# EAGLE board 2021-05-12_11-54-31 (EAGLE 6.4)
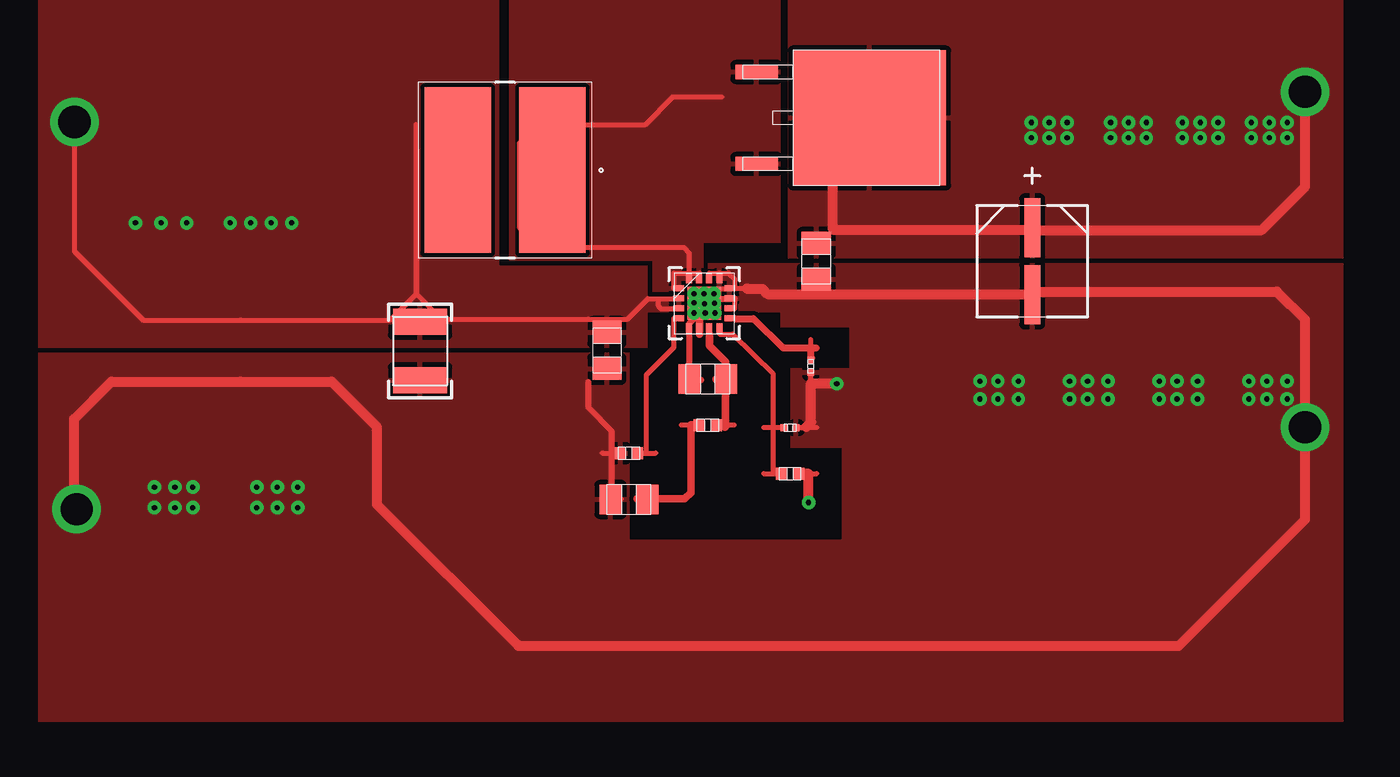
[diagram p0: board, top side]
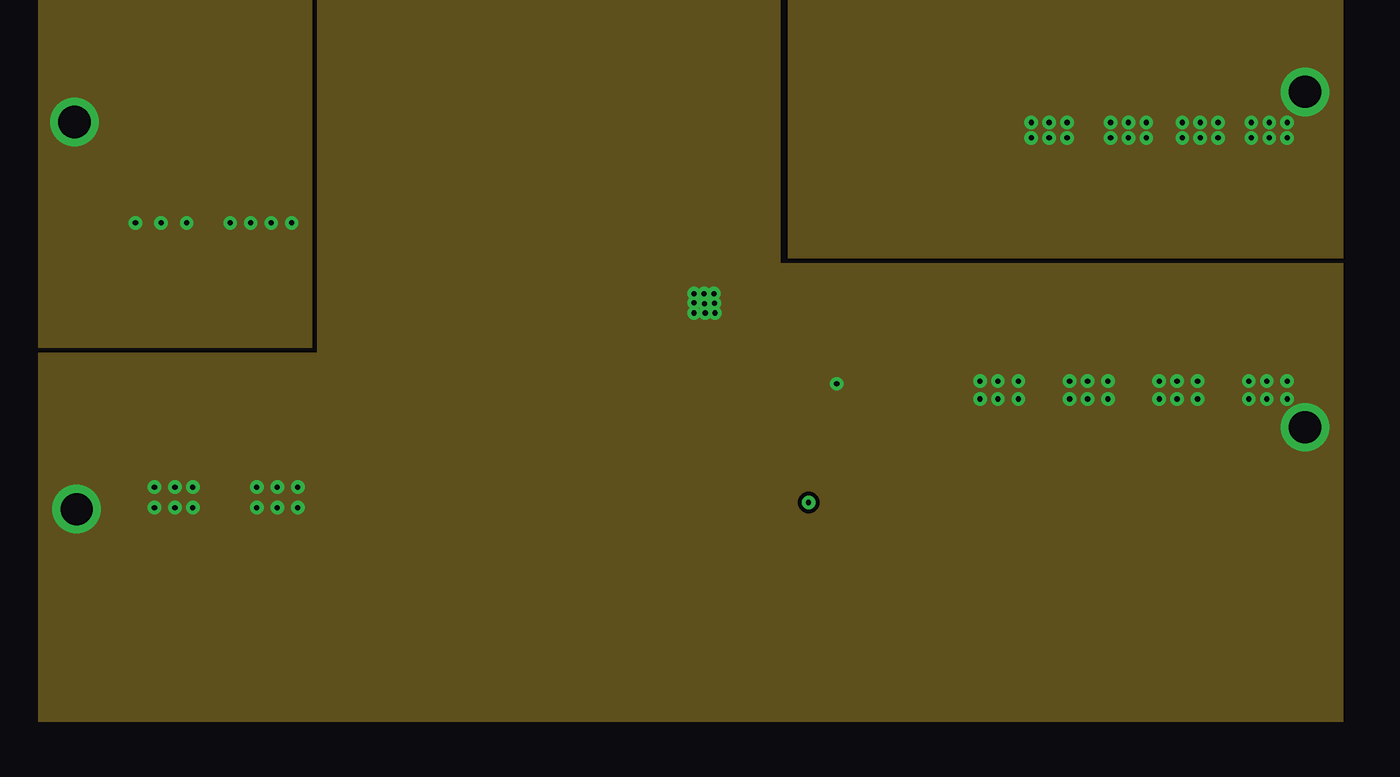
[diagram p1: board, inner layer INTERNAL1]
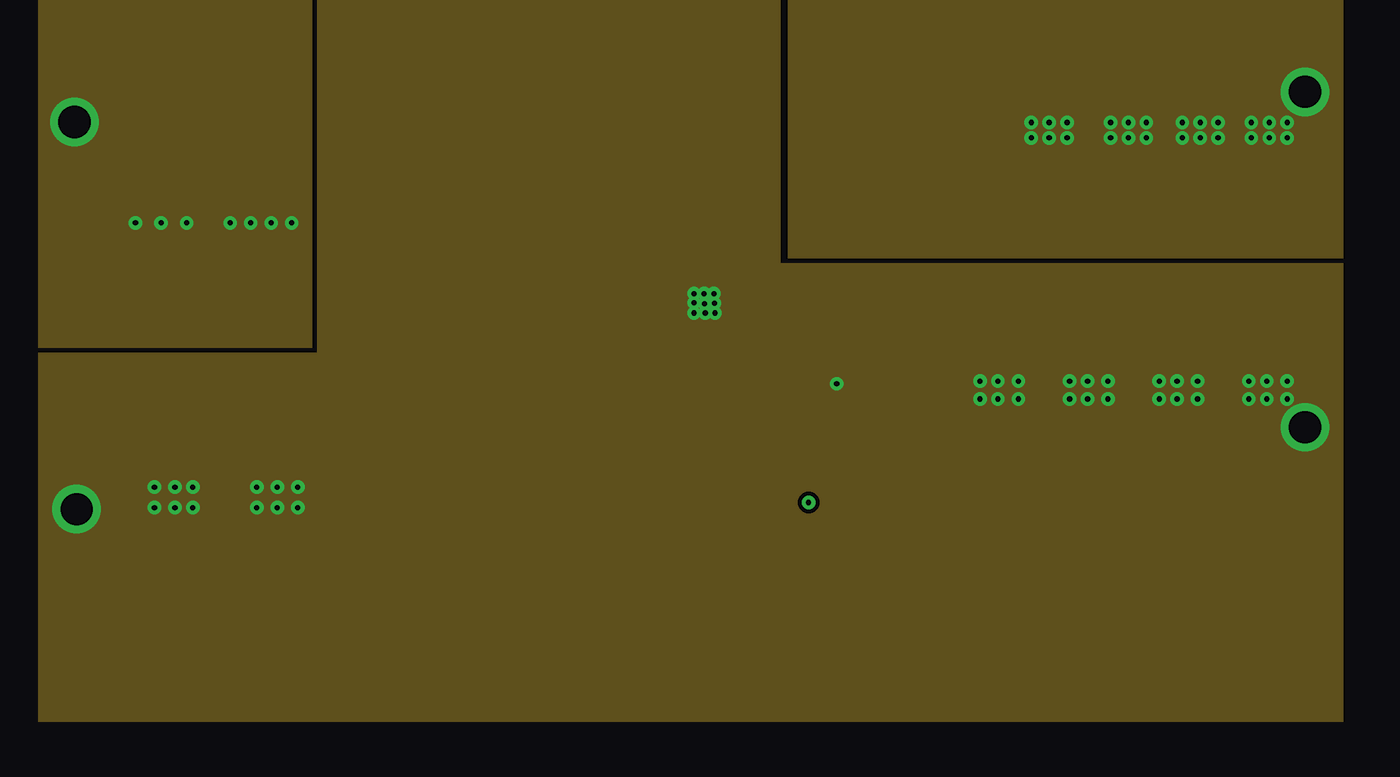
[diagram p2: board, inner layer INTERNAL2]
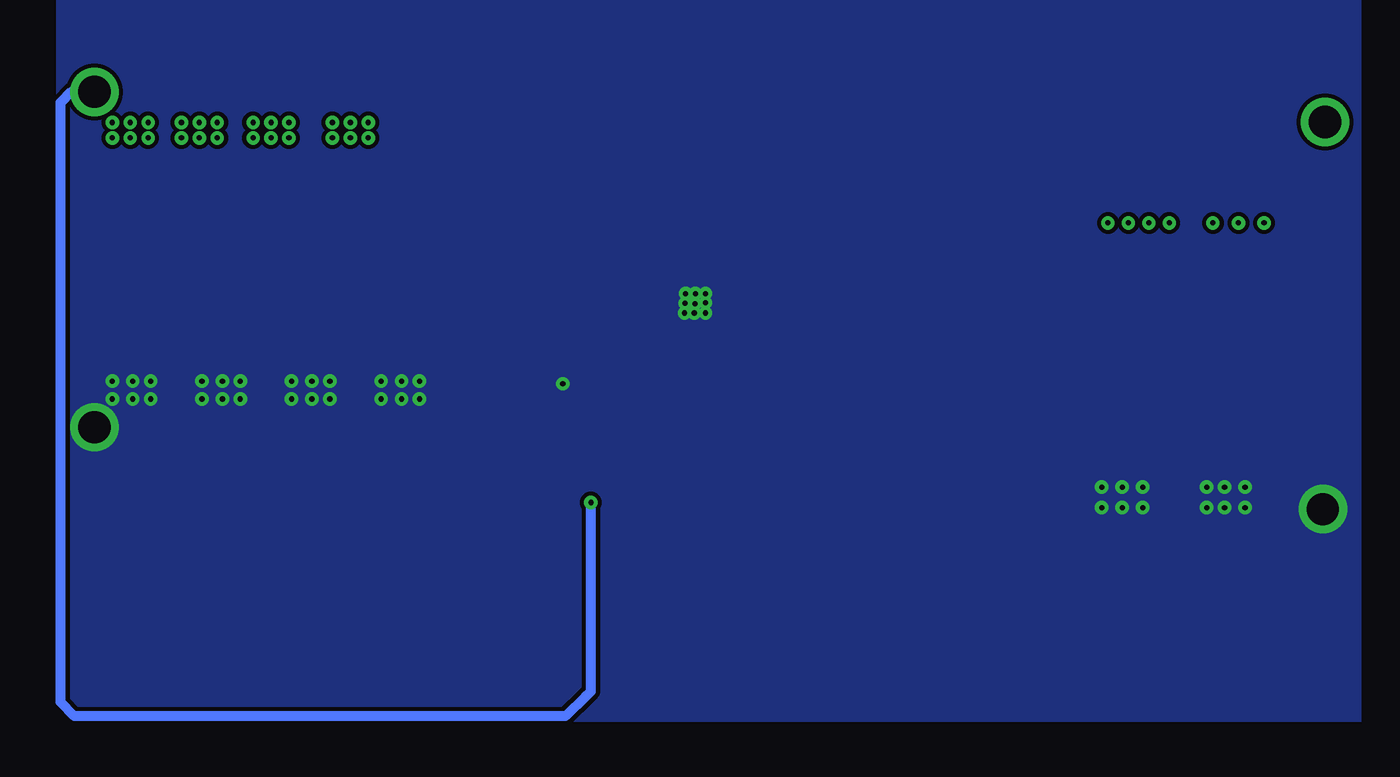
[diagram p3: board, bottom side, seen from below]

No outline drawn. Coordinates in mm, seen from the top.
Copper layers ((1*2)+(15*16)): TOP / INTERNAL1 / layer 15 / BOTTOM

## Footprints (pad centres in the part's own frame; a part is rotated, then mirrored left to right if it is on the bottom)
0805 = smd 1.118 x 1.448: 1 -0.902,0; 2 0.902,0
1210 = smd 1.3 x 2.7: 1 -1.45,0; 2 1.45,0
CAPSMT_62_E61 = smd 2.934 x 0.787: 1 -1.657,0; 2 1.657,0
0402 = smd 0.559 x 0.61: 1 -0.419,0; 2 0.419,0
DPAK = smd 0.701 x 2.111: 1 -2.28,-5.45; 3 2.28,-5.45 | smd 6.7 x 7.605: 2 0,0.152
TP-5012 = drill 0.813 round: 1 0,0
VLP8040 = smd 3.302 x 8.204: 1 -2.349,0; 2 2.349,0
0201 = smd 0.356 x 0.33: 1 -0.292,0; 2 0.292,0
S-PWQFN-N16 = smd 0.5 x 0.3: 1 -1.25,0.75; 2 -1.25,0.25; 3 -1.25,-0.25; 4 -1.25,-0.75; 9 1.25,-0.75; 10 1.25,-0.25; 11 1.25,0.25; 12 1.25,0.75 | smd 0.3 x 0.5: 5 -0.75,-1.25; 6 -0.25,-1.25; 7 0.25,-1.25; 8 0.75,-1.25; 13 0.75,1.25; 14 0.25,1.25; 15 -0.25,1.25; 16 -0.75,1.25 | smd 1.65 x 1.65: 17 0,0

## Placement (x,y rotation side)
Ccomp  [0805]  55.35,37.06 180 top
Ccomp2  [0805]  59.26,43.03 0 top
Cin  [1210]  44.98,44.42 270 top
Cinx  [0805]  54.25,44.45 270 top
Cout  [CAPSMT_62_E61]  75.36,48.87 270 top
Coutx  [0805]  64.64,48.87 270 top
Css  [0402]  55.35,39.34 180 top
D1  [DPAK]  67.13,55.98 270 top
GND  [TP-5012]  27.91,36.55 0 top
GND1  [TP-5012]  88.9,40.61 0 top
L1  [VLP8040]  49.2,53.39 180 top
Rcomp  [0402]  59.26,40.74 0 top
Rfbb  [0201]  63.35,40.61 0 top
Rfbt  [0402]  63.35,38.33 180 top
Rt  [0201]  64.36,43.66 270 top
U1  [S-PWQFN-N16]  59.08,46.79 0 top
Vin  [TP-5012]  27.81,55.78 0 top
Vout  [TP-5012]  88.9,57.25 0 top

## Library data of the parts
Ccomp = ultra-librarian; RefDes: Ccomp; Type: CGA4C2C0G1H103J060AA
Ccomp2 = ultra-librarian; RefDes: Ccomp2; Type: C2012C0G1H152J060AA
Cin = ultra-librarian; RefDes: Cin; Type: C3225X7R1H106M250AC
Cinx = ultra-librarian; RefDes: Cinx; Type: C0805C104M5RACTU
Cout = ultra-librarian; RefDes: Cout; Type: 25SVPF27MX
Coutx = ultra-librarian; RefDes: Coutx; Type: GMK212B7105KG-T
Css = ultra-librarian; RefDes: Css; Type: GRM155R71C223KA01D
D1 = ultra-librarian; RefDes: D1; Type: SBRD10200TR
GND = ultra-librarian; RefDes: GND; Type: TP-5012
GND1 = ultra-librarian; RefDes: GND1; Type: TP-5012
L1 = ultra-librarian; RefDes: L1; Type: VLP8040T-2R2N
Rcomp = ultra-librarian; RefDes: Rcomp; Type: CRCW04022K43FKED
Rfbb = ultra-librarian; RefDes: Rfbb; Type: RC0201FR-0710KL
Rfbt = ultra-librarian; RefDes: Rfbt; Type: CRCW0402143KFKED
Rt = ultra-librarian; RefDes: Rt; Type: CRCW020144K2FNED
U1 = ultra-librarian; RefDes: U1; Type: TPS55340QRTERQ1
Vin = ultra-librarian; RefDes: Vin; Type: TP-5012
Vout = ultra-librarian; RefDes: Vout; Type: TP-5012

## Nets
0: Ccomp2.1 Ccomp.2 Cin.2 Cinx.2 Cout.2 Coutx.2 Css.2 GND1.1 GND.1 Rfbb.2 Rt.2 U1.5 U1.6 U1.11 U1.12 U1.13 U1.17
1: Cin.1 Cinx.1 L1.1 U1.2 U1.3 Vin.1
2: Css.1 U1.4
3: Rfbb.1 Rfbt.2 U1.8
4: Ccomp2.2 Rcomp.2 U1.7
5: D1.1 D1.3 L1.2 U1.1 U1.15 U1.16
6: Rt.1 U1.9
8: Ccomp.1 Rcomp.1
9: Cout.1 Coutx.1 D1.2 Rfbt.1 Vout.1
S$10netdata: U1.10 U1.14

## Tracks (layer width: path | path; a pad name or v marks a point on that pad's centre or on a via)
0  (via drill 0.25 pad 0.56, 1.6 pad 2.21)
  TOP 0.254: 60.6,47.52 60.6,47.98 60.3,48.28 59.84,48.28 59.33,48.28 | 60.6,47.52 61.19,47.52 | 60.6,47.52 60.58,47.5 59.66,47.5 59.59,47.42 59.59,47.24 | 60.6,46.53 60.6,47.02 | 75.56,47.37 75.69,47.5 | 54.03,39.36 54.97,39.36 | 54.03,37.07 54.97,37.07 | 57.94,43.04 58.88,43.04 | 63.73,40.63 64.67,40.63 | 64.38,42.34 64.38,43.28
  TOP 0.305: 53.34,42.88 53.34,41.63 54.51,40.44 54.51,39.37 54.51,37.08 | 58.93,42.98 58.5,42.98 58.42,43.05 | 60.6,47.02 59.82,47.02 v59.59,46.79 58.85,46.05 | 58.34,43.2 58.34,45.26 58.34,45.8 58.67,46.13 58.67,46.38 | 58.34,42.98 58.34,43.05
  TOP 0.381: 58.85,45.26 58.85,46.05
  TOP 0.508: 61.19,47.52 61.24,47.5 61.98,47.5 62.23,47.24 75.44,47.24 75.56,47.37 75.59,47.37 87.5,47.37 88.9,45.97 v88.9,40.64 88.9,36.07 82.63,29.79 49.86,29.79 42.85,36.8 42.85,40.64 40.59,42.9 36.07,42.9 29.67,42.9 27.81,41.05 27.81,36.58 | v65.66,42.8 65.61,42.82 64.39,42.82 64.39,40.89 64.14,40.64
  other vias: 58.57,46.3 59.11,46.76 59.56,47.27 31.8,37.67 32.82,37.67 33.71,37.67 33.71,36.65 32.82,36.65 31.8,36.65 36.88,36.65 37.9,36.65 38.91,36.65 38.91,37.67 37.9,37.67 36.88,37.67 72.77,42.04 72.77,42.93 73.66,42.93 74.68,42.93 73.66,42.04 74.68,42.04 77.22,42.04 77.22,42.93 78.11,42.93 79.12,42.93 78.11,42.04 79.12,42.04 83.57,42.04 82.55,42.04 83.57,42.93 82.55,42.93 81.66,42.93 81.66,42.04 86.11,42.04 86.11,42.93 87,42.93 88.01,42.93 87,42.04 88.01,42.04 58.57,47.27 58.57,46.81 59.13,46.3 59.61,46.3 59.08,47.27 27.94,36.58
  pour TOP (rank 5): 26.04,44.32 26.04,26.04 90.81,26.04 90.81,48.77 59.18,48.77 59.18,47.62 58.29,47.62 58.29,45.97 59.94,45.97 59.94,46.35 62.87,46.35 62.87,45.59 66.29,45.59 66.29,43.56 63.37,43.56 63.37,39.62 65.91,39.62 65.91,35.05 55.37,35.05 55.37,44.32
  pour BOTTOM (rank 6): 26.04,26.04 90.81,26.04 90.81,62.87 26.04,62.87
  pour INTERNAL2 (rank 4): 39.88,62.87 39.88,44.32 26.04,44.32 26.04,26.04 90.81,26.04 90.81,48.77 62.87,48.77 62.87,62.87
  pour INTERNAL1 (rank 5): 39.88,62.87 39.88,44.32 26.04,44.32 26.04,26.04 90.81,26.04 90.81,48.77 62.87,48.77 62.87,62.87
1  (via drill 0.25 pad 0.56, 1.6 pad 2.21)
  TOP 0.254: 44.83,54.36 44.83,47.22 46.02,46 53.34,46 55.27,46 56.29,47.02 57.58,47.02 | 44.78,55.65 44.78,47.24 43.48,45.95 36.07,45.95 31.24,45.95 27.84,49.35 v27.84,55.78 | 57.58,46.53 57.56,46.51 56.95,46.51 56.82,46.63 56.82,46.91
  other vias: 32.13,50.77 36.58,50.77 37.59,50.77 30.86,50.77 33.4,50.77 38.61,50.77 35.56,50.77
  pour TOP (rank 4): 58.04,46.35 56.26,46.35 56.26,44.58 26.04,44.58 26.04,62.87 48.9,62.87 48.9,48.64 56.26,48.64 56.26,47.12 58.04,47.12
  pour INTERNAL2: 26.04,62.87 39.62,62.87 39.62,44.58 26.04,44.58
  pour INTERNAL1 (rank 2): 26.04,62.87 39.62,62.87 39.62,44.58 26.04,44.58
2
  TOP 0.254: 55.7,39.37 56.21,39.37 | 56.21,39.37 56.21,43.23 57.58,44.6 57.58,46.02 | 56.21,39.37 | 55.73,39.36 56.67,39.36
3
  TOP 0.254: 62.51,40.56 62.51,43.28 60.5,45.26 59.84,45.26 | 63.04,40.62 63.02,40.64 62.51,40.64 62.51,38.35 | 62.51,38.35 | 62.51,38.35 62.99,38.35 | 62.03,38.34 62.97,38.34 | 62.03,40.63 62.97,40.63
4
  TOP 0.254: 59.64,43.04 60.58,43.04 | 59.64,40.75 60.58,40.75
  TOP 0.381: 59.66,43.03 59.69,43.05 60.12,43.05 | 59.66,40.77 60.12,40.77 | 59.33,45.26 59.33,44.68 60.15,43.89 60.15,43.05 60.15,40.66 60.12,40.64
5
  TOP 0.254: 59.94,57.02 57.53,57.02 56.16,55.65 53.49,55.65 50.83,55.65 49.91,54.74 49.91,50.55 50.9,49.55 58.06,49.55 58.34,49.25 58.34,48.28 | 57.58,47.52 57.58,48.28 58.34,48.28 | 58.34,48.28 58.85,48.28
  pour TOP (rank 3): 49.4,48.9 56.52,48.9 56.52,47.37 58.04,47.37 58.04,47.88 59.05,47.88 59.05,49.78 62.87,49.78 62.87,62.87 49.4,62.87
6
  TOP 0.254: 64.38,44.04 64.38,44.98
  TOP 0.356: 64.64,44.58 62.99,44.58 61.52,46.02 60.6,46.02 | 64.41,44.07 64.39,44.09 64.39,44.53
8
  TOP 0.254: 55.73,37.07 56.67,37.07 | 57.94,40.75 58.88,40.75
  TOP 0.381: 58.88,40.79 58.85,40.77 58.42,40.77 58.42,37.39 58.12,37.08 56.21,37.08 55.75,37.08
9  (via drill 0.25 pad 0.56, 1.6 pad 2.21)
  TOP 0.254: 63.73,38.34 64.67,38.34
  TOP 0.508: 66.47,57.07 66.47,54.3 65.48,53.31 65.48,50.44 | 75.59,50.42 86.74,50.42 88.9,52.58 88.9,57.15 | v64.26,36.91 64.26,38.33 | 75.44,50.44 65.53,50.44 65.51,50.42 | 63.88,38.35 64.21,38.35
  BOTTOM 0.508: v88.9,57.28 90.04,57.28 90.58,56.74 90.58,27 89.89,26.31 65.53,26.31 64.52,27.3 64.26,27.53 v64.26,36.91
  other vias: 86.23,55.75 87.12,55.75 88.01,55.75 86.23,54.99 87.12,54.99 88.01,54.99 82.8,55.75 83.69,55.75 84.58,55.75 82.8,54.99 83.69,54.99 84.58,54.99 79.25,55.75 80.14,55.75 81.03,55.75 79.25,54.99 80.14,54.99 81.03,54.99 77.09,54.99 76.2,54.99 75.31,54.99 77.09,55.75 76.2,55.75 75.31,55.75
  pour TOP (rank 3): 63.25,62.87 63.25,49.02 90.81,49.02 90.81,62.87
  pour INTERNAL2: 63.25,62.87 63.25,49.02 90.81,49.02 90.81,62.87
  pour INTERNAL1 (rank 2): 63.25,62.87 63.25,49.02 90.81,49.02 90.81,62.87